# Altium PCB PCB.PcbDoc
Units mm, origin at the board's own origin, x right, y up, seen from the top; angles counter-clockwise.
Board outline 85 x 82.5 mm, 2 copper layers (Top Layer, Bottom Layer); 38 components, 31 nets, 144 pads, 23 vias.
Unrouted connection lines stored in the file: 1.
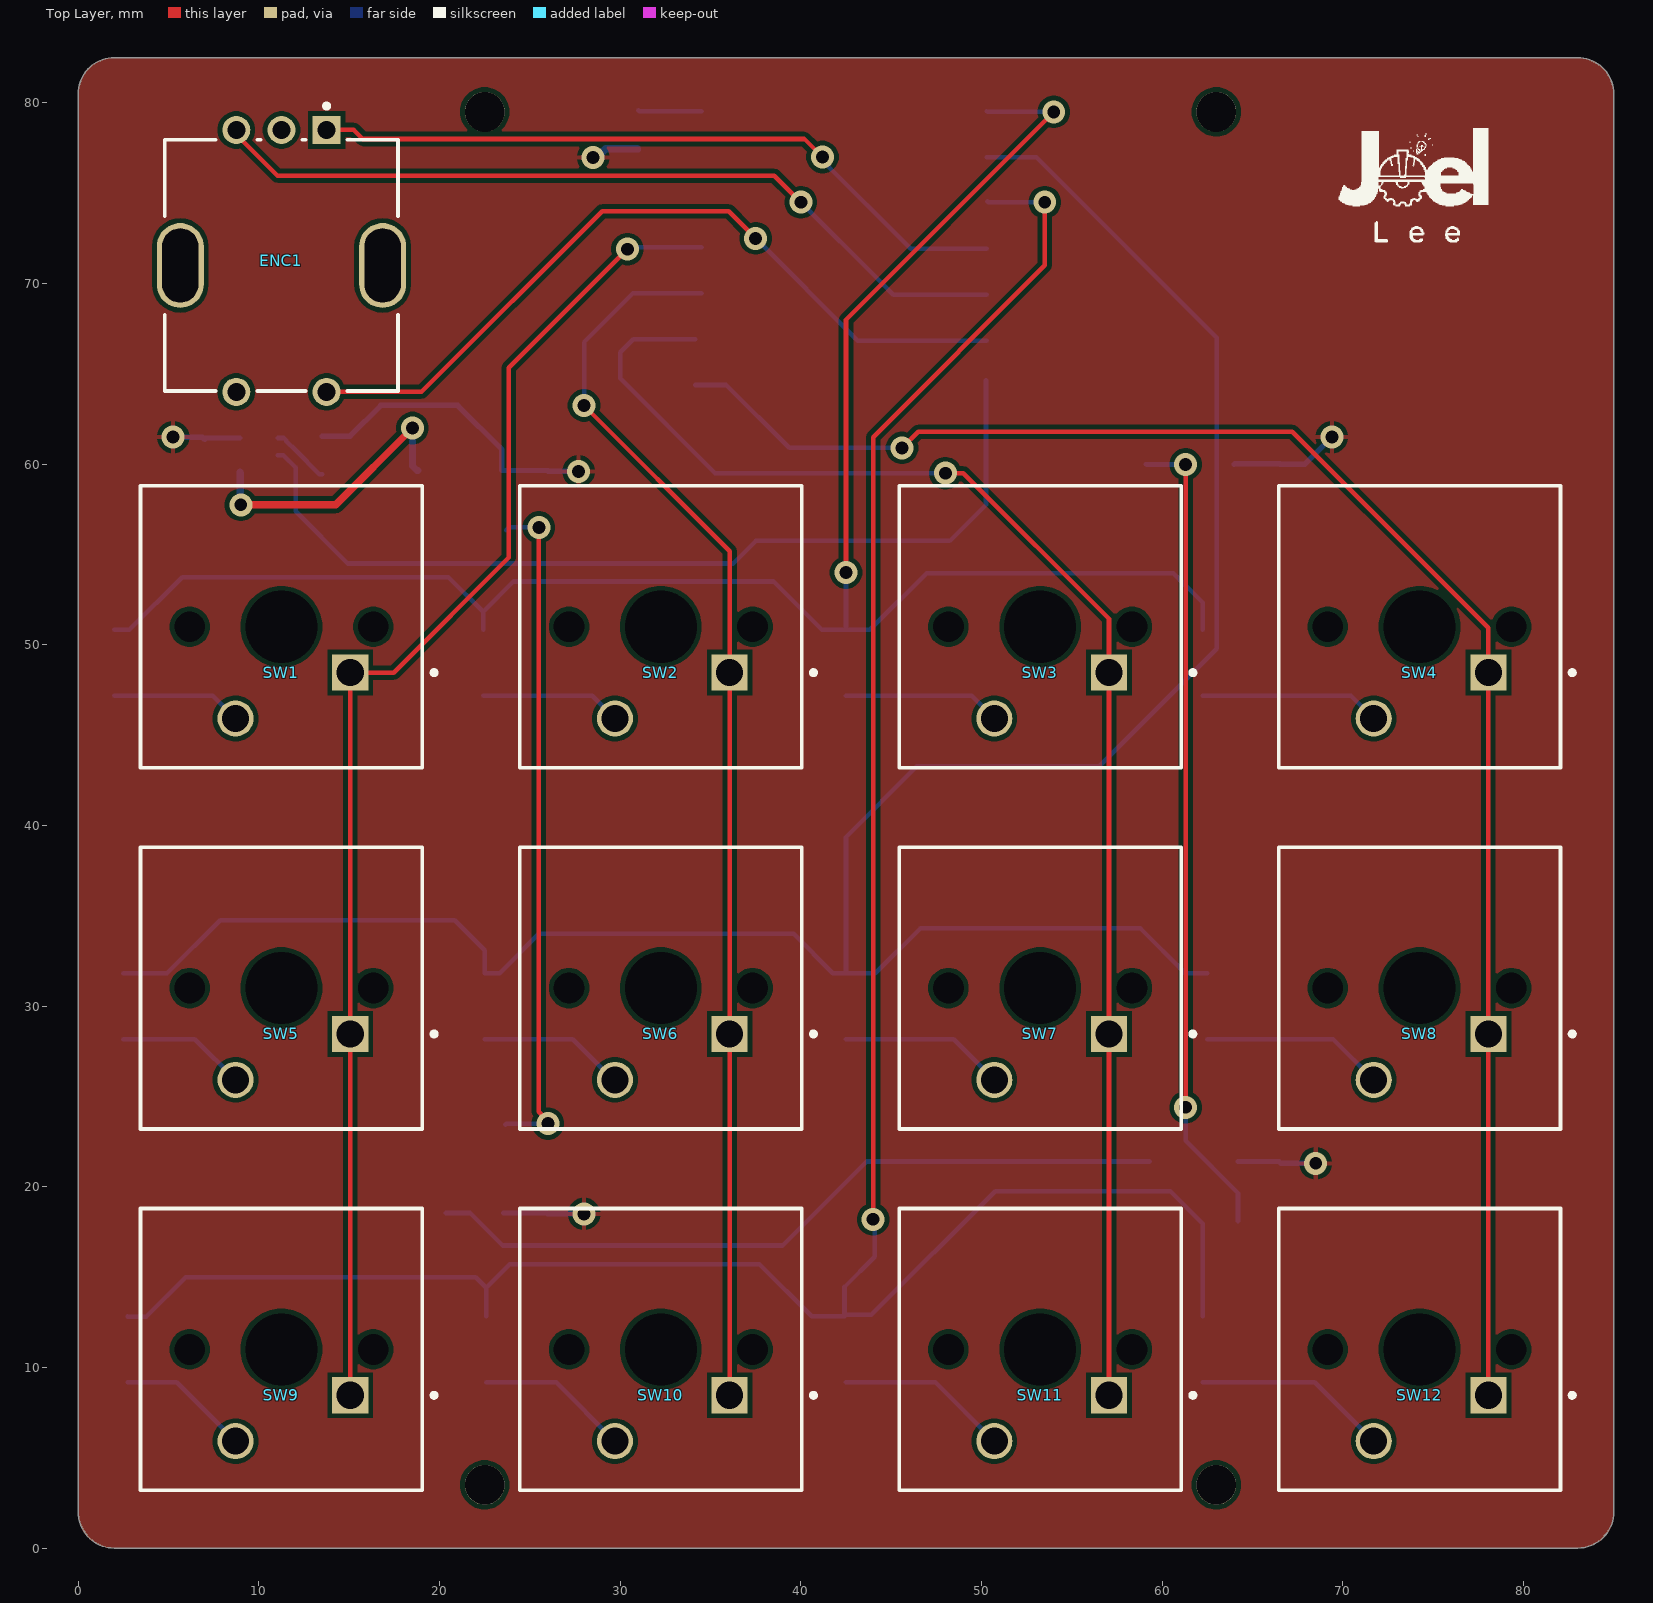
[diagram p0: Top Layer view]
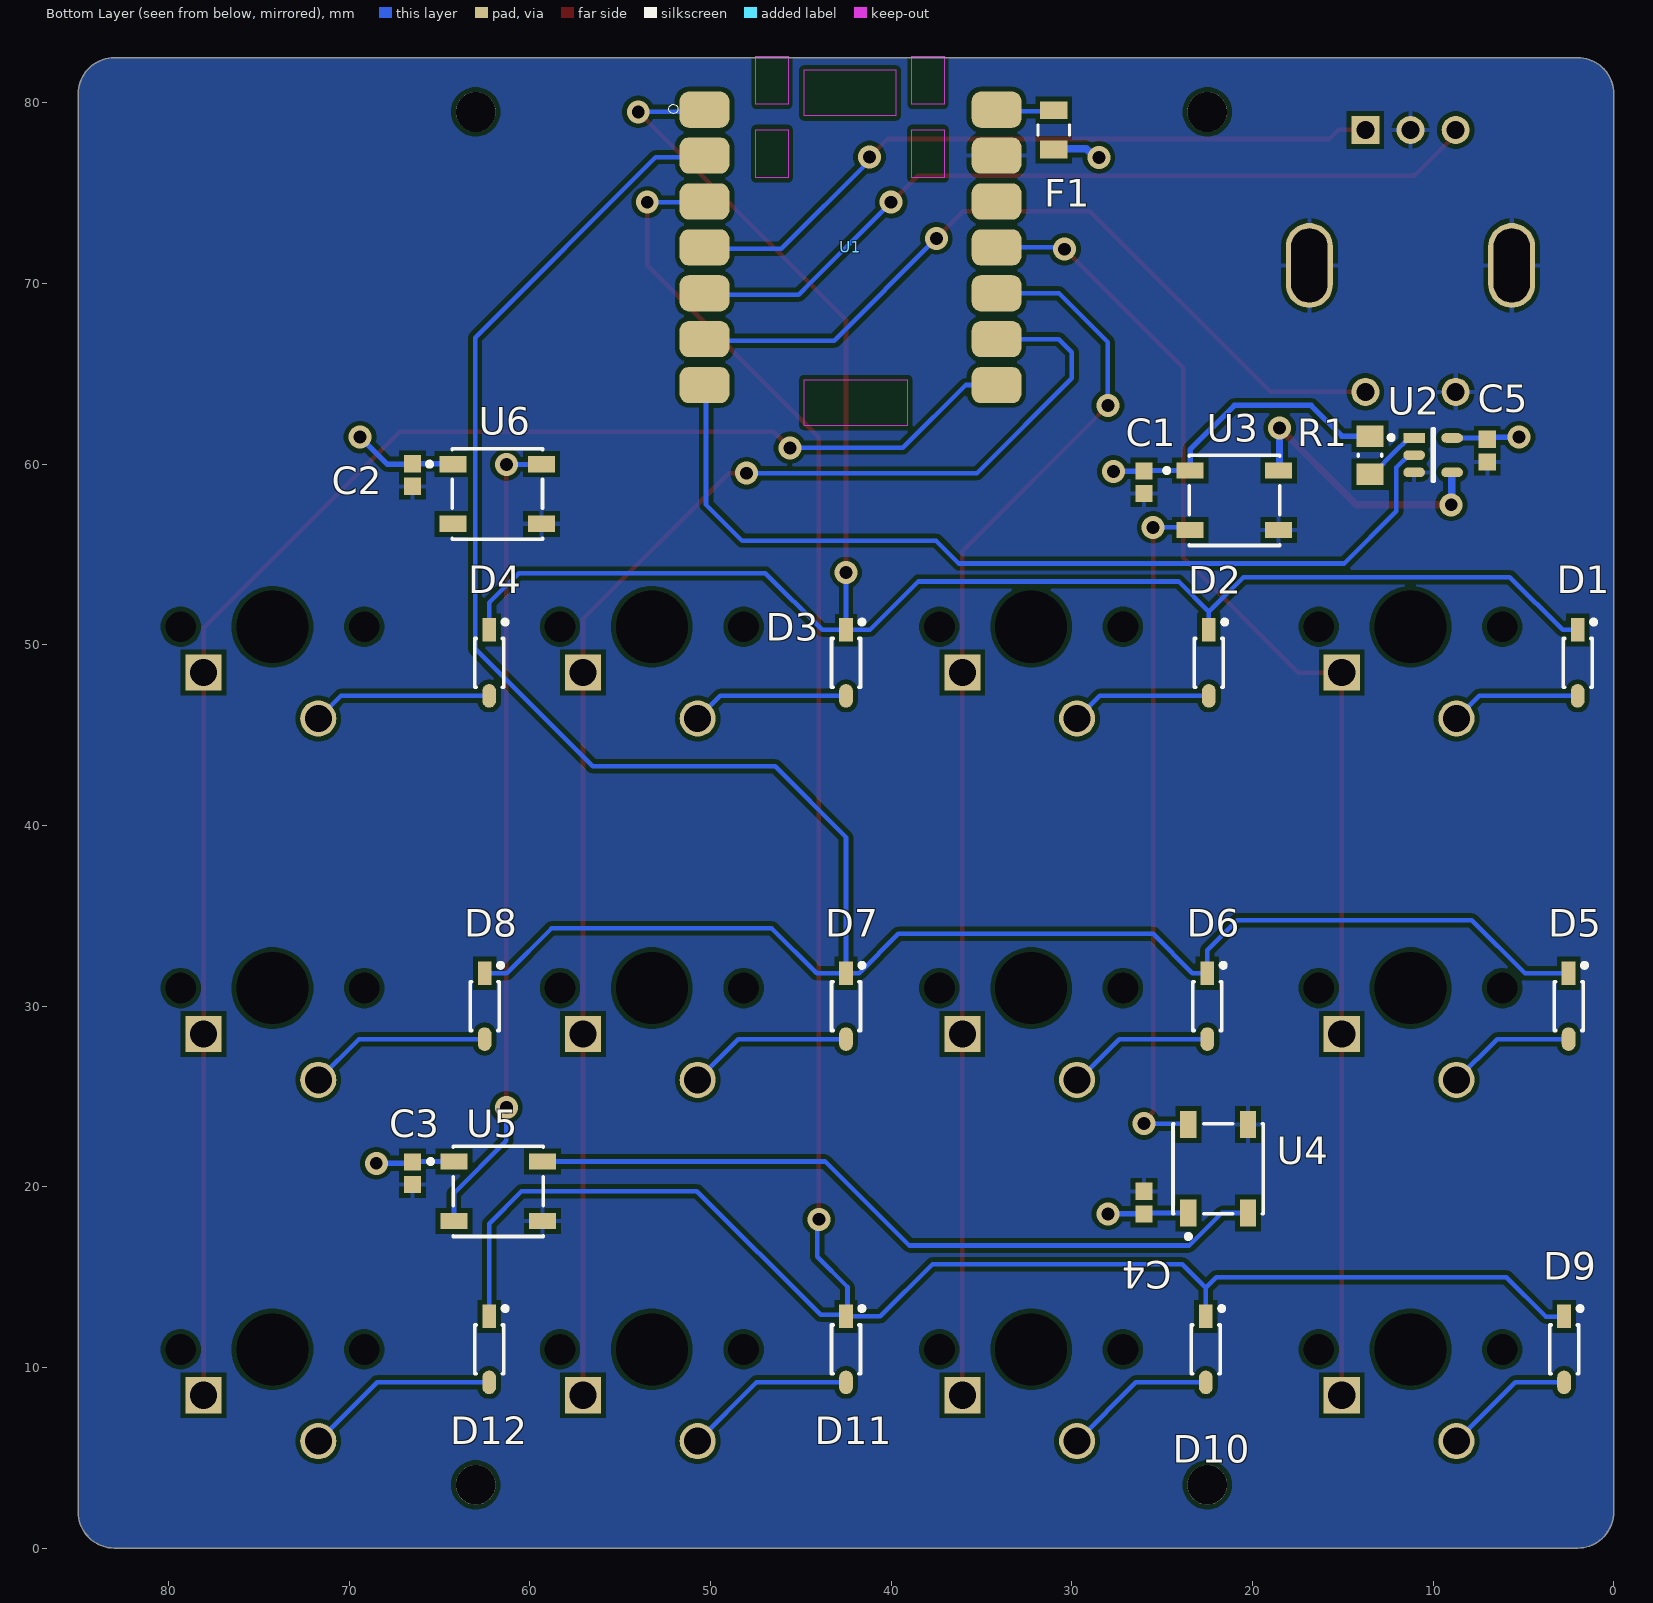
[diagram p1: Bottom Layer view, seen from below]
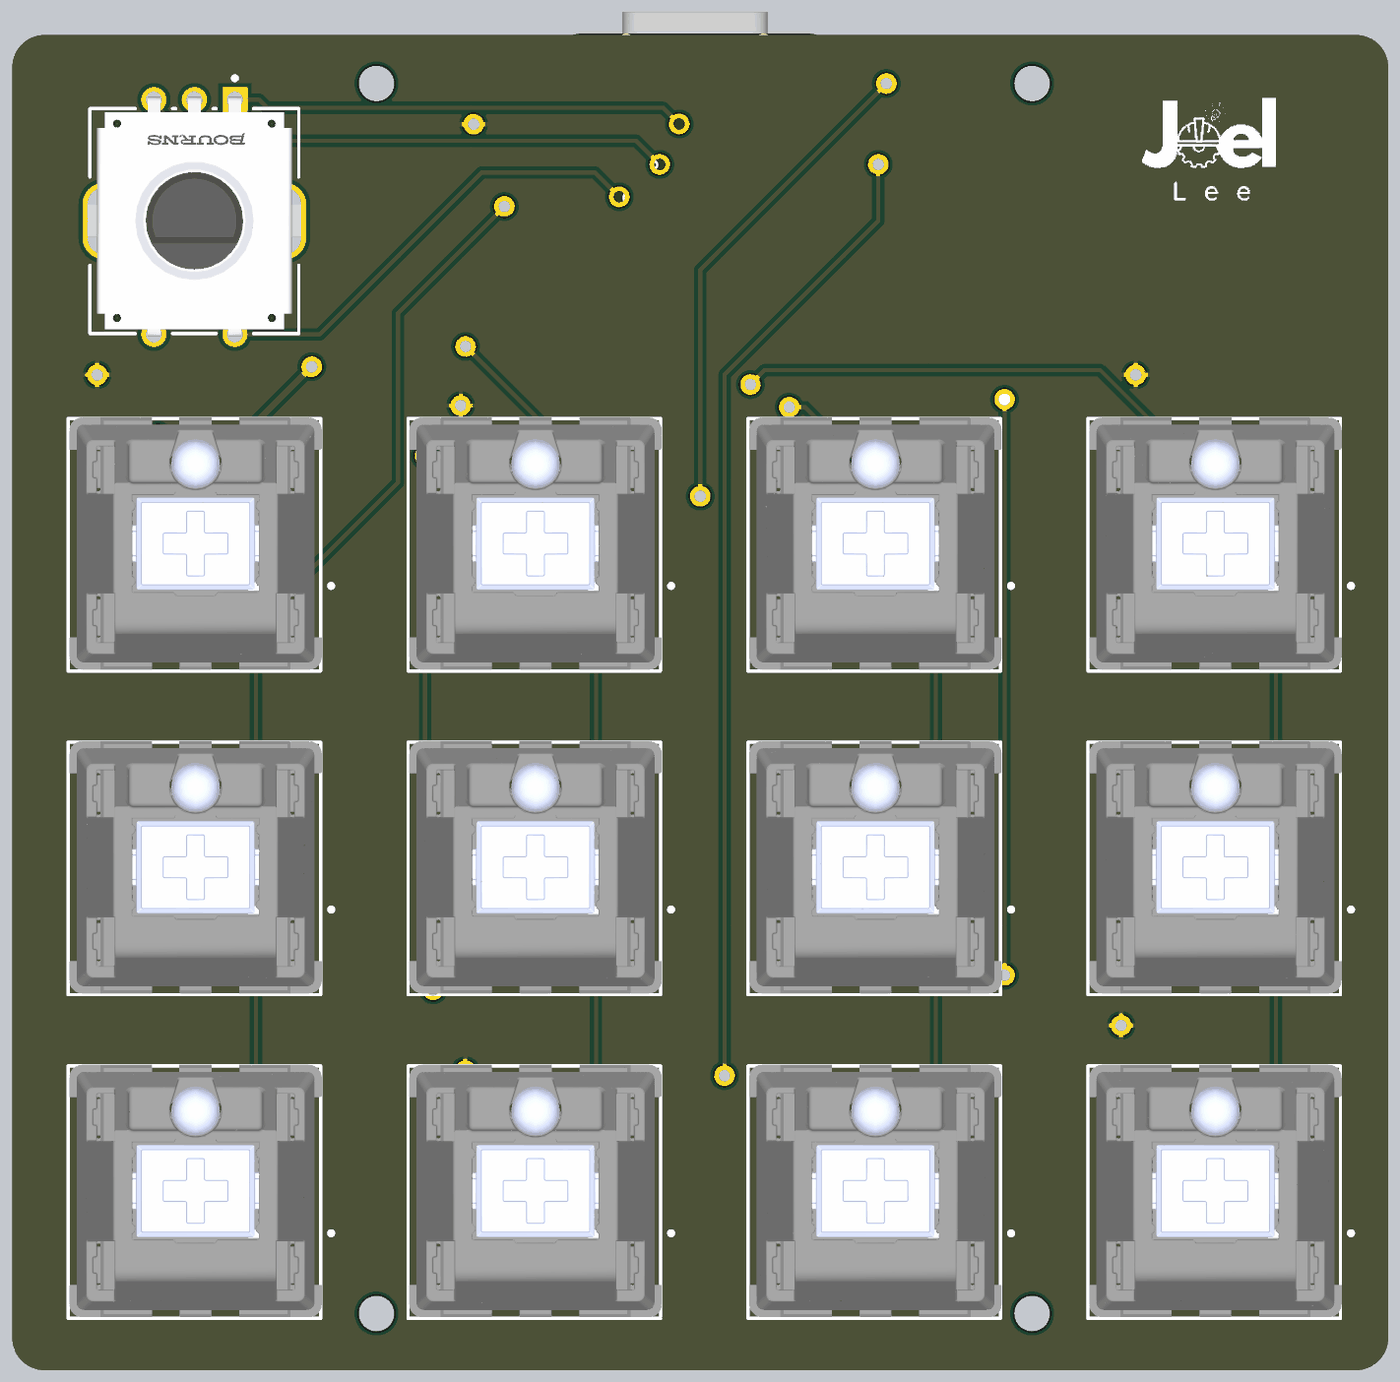
[diagram p2: 3D render of the assembled board from above, using the file's embedded part models]
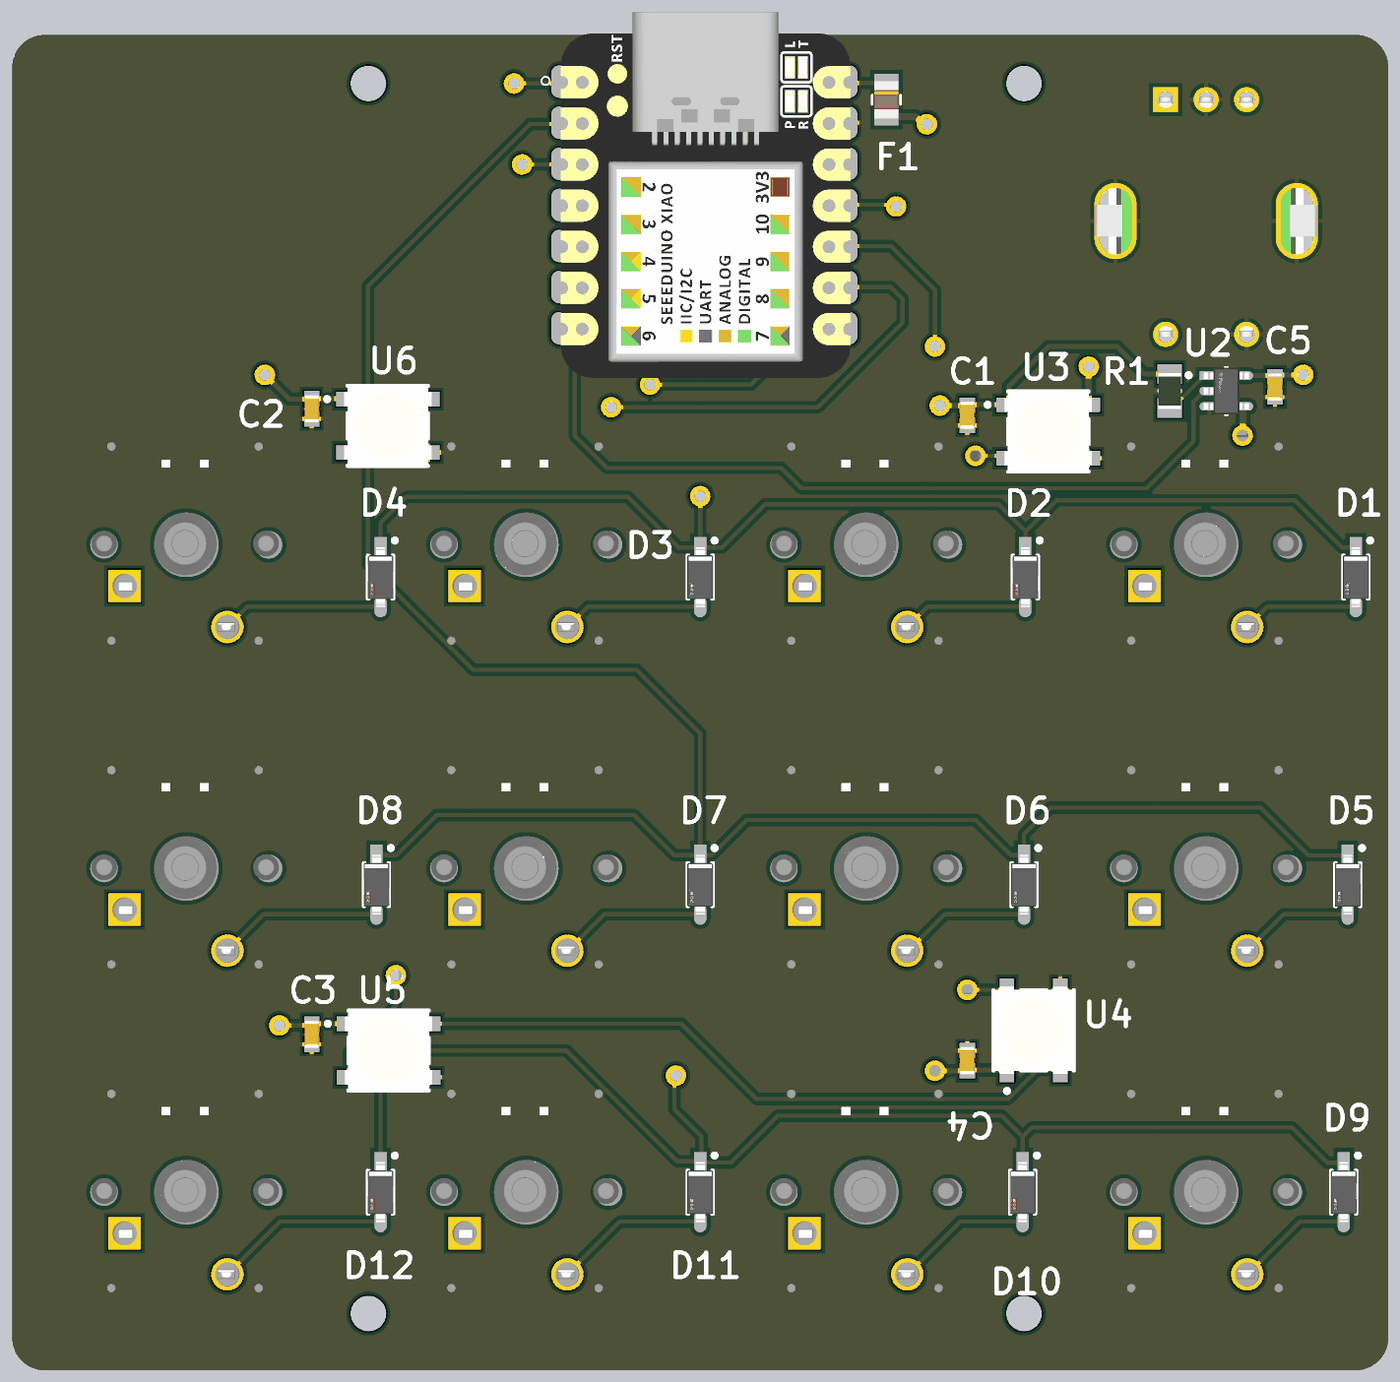
[diagram p3: 3D render of the assembled board from below, using the file's embedded part models]

## Layer stack, top to bottom
Top Solder: solder mask 0.0102, Solder Resist, Dk 3.5
Top Layer: signal copper 0.0356
Dielectric 1: dielectric 0.32, FR-4, Dk 4.8
Bottom Layer: signal copper 0.0356
Bottom Solder: solder mask 0.0102, Solder Resist, Dk 3.5

## Board outline
0,2 0,80.5 cw(c2,80.5) 2,82.5 83,82.497 cw(c83.002,80.498) 85,80.5 85,2 cw(c83,2) 83,0 2,0 cw(c2,2)

## Design rules (kind name [scope] priority, off if disabled: settings)
Clearance Clearance_1 [OnMid vs OnMid] p1: gap=0.254 ignorepadtopadclearanceinfootprint=FALSE sourcerule=38 cellrowname=All cellrowtype=0 cellcolname=All cellcoltype=0 innerlayers=TRUE
Clearance Clearance_2 [(ExistsOnLayer('Top Layer') Or ExistsOnLayer('Bottom Layer')) vs (ExistsOnLayer('Top Layer') Or ExistsOnLayer('Bottom Layer'))] p2: gap=0.254 ignorepadtopadclearanceinfootprint=FALSE sourcerule=38 cellrowname=All cellrowtype=0 cellcolname=All cellcoltype=0 outerlayers=TRUE
Clearance [All] p3: gap=0.254 ignorepadtopadclearanceinfootprint=FALSE ismatrix=TRUE
HoleSize [All] p1: absolutevalues=TRUE maxlimit=5 minlimit=0.025 maxpercent=80.000 minpercent=20.000
MinimumSolderMaskSliver [All] p1: minsoldermaskwidth=0.09
PolygonConnect [All] p1: connectstyle=Relief reliefconductorwidth=0.254 reliefentries=4 polygonreliefangle="90 Angle" airgapwidth=0.254
RoutingVias [All] p1: holewidth=0.711 width=1.27 viastyle="Through Hole" minholewidth=0.711 minwidth=1.27 maxholewidth=0.711 maxwidth=1.27
SilkToSolderMaskClearance [IsPad] p1: minsilkscreentomaskgap=0.09 clearancetoexposedcopper=TRUE
SolderMaskExpansion [All] p1: expansion=0.102 istentingtop=FALSE
Width MaxMinWidth_1 [InNet('5V')] p1: maxlimit=0.5 minlimit=0.3 preferedwidth=0.4 minimp=50.000000 maximp=50.000000 favimp=50.000000
Width MaxMinWidth_2 [InNet('NeoPixel 5V')] p2: maxlimit=0.5 minlimit=0.3 preferedwidth=0.4 minimp=50.000000 maximp=50.000000 favimp=50.000000
Width [All] p3: maxlimit=0.254 minlimit=0.254 preferedwidth=0.254
27 further rules are at their usual default settings.

## Components (designator, comment, footprint, x,y, rotation, side; value= is the part's Value field where it differs from the comment)
C1 "Capacitor 100 nF +/-10% 50 V 0603" CAPC1608X90X40NL10T20 26,59 r90 bottom value=100nF
C2 "Capacitor 100 nF +/-10% 50 V 0603" CAPC1608X90X40NL10T20 66.5,59.4 r90 bottom value=100nF
C3 "Capacitor 100 nF +/-10% 50 V 0603" CAPC1608X90X40NL10T20 66.5,20.75 r90 bottom value=100nF
C4 "Capacitor 100 nF +/-10% 50 V 0603" CAPC1608X90X40NL10T20 26,19.125 r270 bottom value=100nF
C5 "Capacitor 100 nF +/-10% 50 V 0603" CAPC1608X90X40NL10T20 7,60.75 r90 bottom value=100nF
D1 "1N4148W-TP" FP-SOD-123-IPC_A 2,49 r270 bottom
D2 "1N4148W-TP" FP-SOD-123-IPC_A 22.417,49 r270 bottom
D3 "1N4148W-TP" FP-SOD-123-IPC_A 42.5,49 r270 bottom
D4 "1N4148W-TP" FP-SOD-123-IPC_A 62.25,49 r270 bottom
D5 "1N4148W-TP" FP-SOD-123-IPC_A 2.5,30 r270 bottom
D6 "1N4148W-TP" FP-SOD-123-IPC_A 22.5,30 r270 bottom
D7 "1N4148W-TP" FP-SOD-123-IPC_A 42.5,30 r270 bottom
D8 "1N4148W-TP" FP-SOD-123-IPC_A 62.5,30 r270 bottom
D9 "1N4148W-TP" FP-SOD-123-IPC_A 2.75,11 r270 bottom
D10 "1N4148W-TP" FP-SOD-123-IPC_A 22.583,11 r270 bottom
D11 "1N4148W-TP" FP-SOD-123-IPC_A 42.5,11 r270 bottom
D12 "1N4148W-TP" FP-SOD-123-IPC_A 62.25,11 r270 bottom
ENC1 "PEC12R-4220F-S0024" FP-PEC12R-4220F-S0024-MFG 11.25,71 r180 top
F1 "0ZCK0050FF2E" 0ZCK_BEL 31,78.5 r270 bottom
R1 "Resistor 10k +/-1% 0805 125 mW" RESC2013X50X35ML15T15 13.5,60.5 r90 bottom value=10k
SW1 "MX1A-11NW" CHRY-MX1A-11NW_V 11.25,51 r180 top
SW2 "MX1A-11NW" CHRY-MX1A-11NW_V 32.25,51 r180 top
SW3 "MX1A-11NW" CHRY-MX1A-11NW_V 53.25,51 r180 top
SW4 "MX1A-11NW" CHRY-MX1A-11NW_V 74.25,51 r180 top
SW5 "MX1A-11NW" CHRY-MX1A-11NW_V 11.25,31 r180 top
SW6 "MX1A-11NW" CHRY-MX1A-11NW_V 32.25,31 r180 top
SW7 "MX1A-11NW" CHRY-MX1A-11NW_V 53.25,31 r180 top
SW8 "MX1A-11NW" CHRY-MX1A-11NW_V 74.25,31 r180 top
SW9 "MX1A-11NW" CHRY-MX1A-11NW_V 11.25,11 r180 top
SW10 "MX1A-11NW" CHRY-MX1A-11NW_V 32.25,11 r180 top
SW11 "MX1A-11NW" CHRY-MX1A-11NW_V 53.25,11 r180 top
SW12 "MX1A-11NW" CHRY-MX1A-11NW_V 74.25,11 r180 top
U1 "MOUDLE-SEEEDUINO-XIAO" MOUDLE14P-2-54-21X17-8MM 51.167,61.5 r180 bottom
U2 "SN74AHCT1G126DBVR" FP-DBV0005A-IPC_C 10,60.5 r180 bottom
U3 "WS2812B NeoPixel" ADA-RGB-1655_V 21,58 r180 bottom
U4 "WS2812B NeoPixel" ADA-RGB-1655_V 21.9,21 r90 bottom
U5 "WS2812B NeoPixel" ADA-RGB-1655_V 61.75,19.75 r180 bottom
U6 "WS2812B NeoPixel" ADA-RGB-1655_V 61.8,58.35 r180 bottom

## Footprints (in the part's own frame and the unit in brackets; to place one, negate y for a bottom-side part, rotate by r counter-clockwise, add the part's x,y. Pads: shape width x height; smd on the part's side, far side on the other; paste and mask are expansions set on the pad)
0ZCK_BEL [mil]
  rect 39x59 smd paste+0 mask+0: 1(-43,0) 2(43,0)
  silkscreen extent -11,-34 11,35, body extent -46,-30 46,30, height 71
ADA-RGB-1655_V [mm] "SMD, 4-Leads, Body 5x5mm"
  rect 1.5x0.9 smd: 1(-2.45,1.65) 2(-2.45,-1.65) 3(2.45,-1.65) 4(2.45,1.65)
  silkscreen extent -3.88,-2.5 2.5,2.5, body extent -2.7,-2.5 2.7,2.5, height 1.68
CAPC1608X90X40NL10T20 [mm] "Chip Capacitor, 2-Leads, Body 1.70x0.90mm, IPC Medium Density"
  rect 0.95x0.95 smd: 1(-0.625,0) 2(0.625,0)
  body extent -0.85,-0.45 0.85,0.45, height 0.9
CHRY-MX1A-11NW_V [mm] "THD, 2-Leads, Body 15.6x15.6mm"
  rect 2x2 hole 1.499 paste-2539.97: 1(-3.81,2.54)
  round 2 hole 1.499 paste-2539.97: 2(2.54,5.08)
  round 0 hole 3.988 unplated paste-2539.97: MH1(0,0)
  round 0 hole 1.702 unplated paste-2539.97: MH2(-5.08,0) MH3(5.08,0)
  silkscreen extent -8.58,-7.8 7.8,7.8, body extent -7.87,-7.87 7.73,7.73, height 3.5
FP-DBV0005A-IPC_C [mm]
  rect 1.205x0.532 smd paste+0 mask+0: 1(-1.05,0.95)
  rrect100% 1.205x0.532 smd paste+0 mask+0: 2(-1.05,0) 3(-1.05,-0.95) 4(1.05,-0.95) 5(1.05,0.95)
  silkscreen extent -2.45,-1.45 0.05,1.45, body extent -1.4,-1.45 1.4,1.45, height 1.45
FP-PEC12R-4220F-S0024-MFG [mm]
  round 1.55 hole 1 paste-2539.97 mask+0: 1(-2.5,7) 2(2.5,7) B(2.5,-7.5) C(0,-7.5)
  rrect100% 2.6x4.7 hole 4.1 slot 2 at 0 deg paste-2539.97 mask+0: 3(-5.6,0) 4(5.6,0)
  rect 1.55x1.55 hole 1 paste-2539.97 mask+0: A(-2.5,-7.5)
  silkscreen extent -6.45,-8.95 6.45,6.95, body extent -7,-8.37 7,7.88, height 0.25
FP-SOD-123-IPC_A [mm]
  rect 1.308x0.762 smd paste+0 mask+0: 1(-1.825,0)
  rrect100% 1.308x0.762 smd paste+0 mask+0: 2(1.825,0)
  silkscreen extent -2.39,-0.8 1.35,1.01, body extent -1.85,-0.8 1.85,0.8, height 1.35
MOUDLE14P-2-54-21X17-8MM [mm]
  rrect50% 2.75x2 smd: 1(0.835,18.12) 2(0.835,15.58) 3(0.835,13.04) 4(0.835,10.5) 5(0.835,7.96) 6(0.835,5.42) 7(0.835,2.88) 8(17,2.88) 9(17,5.42) 10(17,7.96) 11(17,10.5) 12(17,13.04) 13(17,15.58) 14(17,18.12)
  Top Layer keep-out region: 6.35,17.78 6.35,20.32 11.43,20.32 11.43,17.78
  Top Layer keep-out region: 6.35,0.635 6.35,3.175 12.065,3.175 12.065,0.635
  Top Layer keep-out region: 3.683,18.415 3.683,21.082 5.461,21.082 5.461,18.415
  Top Layer keep-out region: 3.683,14.351 3.683,17.018 5.461,17.018 5.461,14.351
  Top Layer keep-out region: 12.319,14.351 12.319,17.018 14.097,17.018 14.097,14.351
  Top Layer keep-out region: 12.319,18.415 12.319,21.082 14.097,21.082 14.097,18.415
  silkscreen extent -1.14,17.91 -0.64,18.41, body extent 0.05,-0.2 17.95,22.4, height 4.5
RESC2013X50X35ML15T15 [mm] "Chip Resistor, 2-Leads, Body 2.2x1.4mm, IPC Low Density"
  rect 1.2x1.5 smd: 1(-1.05,0) 2(1.05,0)
  silkscreen extent -0.05,-0.65 0.05,0.65, body extent -1.1,-0.7 1.1,0.7, height 0.5

## Part data
C1 C2 C3 C4 C5: library part CMP-001-00017-6, "Chip Capacitor, 100 nF, +/- 10%, 50 V, 0603 (1608 Metric)", Capacitor Type=Ceramic, Case/Package=0603, Max Operating Temperature=125°C, Min Operating Temperature=-55°C, Tolerance=10%, Voltage Rating=50V, Mounting Technology=SM, Pins=2, RoHS Compliant=True
D1 D2 D3 D4 D5 D6 D7 D8 D9 D10 D11 D12: library part CMP-2000-04993-2, "DIODE GEN PURP 100V 150MA SOD123", Average Rectified Current=150mA, Capacitance=4pF, Forward Voltage=1V, Max Forward Surge Current (Ifsm)=1A, Max Operating Temperature=150°C, Max Repetitive Reverse Voltage (Vrrm)=100V, Max Reverse Leakage Current=5uA, Max Surge Current=2A, Min Operating Temperature=-65°C, Package Quantity=3000, Power Dissipation=400mW, Current Rating=150mA, Element Configuration=Single, Forward Current=150mA, Height=1.2mm, Lead Free="Lead Free", Length=2.85mm, Max Reverse Voltage (DC)=100V, Mount="Surface Mount", Number of Pins=2, Output Current=150mA, Packaging="Tape and Reel", Peak Non-Repetitive Surge Current=2A, Polarity=Standard, Radiation Hardening=No, Recovery Time=4ns, Reverse Recovery Time=4ns, Voltage Rating (DC)=100V, Width=1.8mm
ENC1: library part CMP-07421-000021-1, "ROTARY ENCODER MECHANICAL 24PPR", Max Operating Temperature=70°C, Max Supply Voltage (DC)=5V, Min Operating Temperature=-30°C, Package Quantity=150, Built in Switch=Yes, Detent=Yes, Encoder Type=Mechanical, Height=13.4mm, Hole Diameter=2mm, Length=26mm, Mount="Through Hole", Number of Channels=2, Orientation=Vertical, Output Type=Quadrature, Packaging=Bulk, Pulses per Revolution=24, REACH SVHC="No SVHC", RoHS Compliant=Yes, Series=PEC12R, Termination="PC Pin", Width=12.5mm
F1: "No Description Available", Mfr_Name=Belfuse
R1: library part CMP-009-00018-5, "Chip Resistor, 10 KOhm, +/- 1%, 125 mW, -55 to 155 degC, 0805 (2012 Metric)", Case/Package=0805, Max Operating Temperature=155°C, Min Operating Temperature=-55°C, Power=125mW, Tolerance=1%, Voltage Rating=150V, Mounting Technology=SM, Pins=2, RoHS Compliant=True
SW1 SW2 SW3 SW4 SW5 SW6 SW7 SW8 SW9 SW10 SW11 SW12: library part CMP-00028-00007-1, "Keypad Switch, 1 Switches, SPST, Momentary, 0.01A, 12VDC, 0.78N, Solder Terminal, Through Hole-straight", Max Operating Temperature=70°C, Min Operating Temperature=-10°C, Mounting Technology="Through Hole", RoHS Compliant=Yes
U1: Package=MOUDLE14P-2.54-21X17.8MM, DeviceSetName=MOUDLE-SEEEDUINO-XIAO, GateName_1=G$1, LibraryName=Seeeduino-XIAO-footprint-eagle, SymbolName_1=MOUDLE-SEEEDUINO-XIAO
U2: library part CMP-0859-00077-4, "IC BUF NON-INVERT 5.5V SOT23-5", Case/Package=SOT-23, High Level Output Current=-8mA, Low Level Output Current=8mA, Max Operating Temperature=125°C, Max Supply Voltage=5.5V, Min Operating Temperature=-40°C, Min Supply Voltage=4.5V, Nominal Supply Current=250mA, Operating Supply Voltage=5V, Package Quantity=3000, Quiescent Current=1uA, Contact Plating=Tin, Lead Free="Lead Free", Logic Function=Buffer, Mount="Surface Mount", Number of Bits=1, Number of Bits per Element=1, Number of Channels=1, Number of Circuits=1, Number of Elements=1, Number of Gates=1, Number of Input Lines=1, Number of Inputs=1, Number of Output Lines=1, Number of Outputs=1, Number of Pins=5, Output Type=3-STATE, Packaging="Tape and Reel", Polarity=Non-Inverting, Propagation Delay=7.5ns, Radiation Hardening=No, REACH SVHC="No SVHC", RoHS Compliant=Yes, Series=74AHCT, Technology=CMOS, Turn-On Delay Time=10ns
U3 U4 U5 U6: library part CMP-007-00037-1, "WS2812B 5050 RGB LED WITH INTEGRATED DRIVER CHIP PACK OF 10"

## Free pads (board coordinates)
  round 2.2 hole 2.2 unplated: MH5(22.5,3.5) MH5(22.5,79.5) MH5(63,3.5) MH5(63,79.5)

## Via types
v1: diameter 1.27, hole 0.711, Top Layer to Bottom Layer, 23 vias

## Nets (pads, with @x,y where several pads share a name; then routed paths per layer and width w, separated by ;. In a path a pad name is that pad's centre, name@x,y a point inside that pad or via, vN(x,y) a via of type N, cw(c..) or ccw(c..) an arc to the next point about the centre after c; other vN are vias at no path point)
5V: C1.2 C2.2 C3.2 C4.2 C5.2 F1.2 R1.2 U2.5 U3.1 U4.1 U5.1 U6.1 | length 38.4
  Bottom Layer w0.3: v1(5.25,61.5) 6.875,61.5 C5.2 7.075,61.45 U2.5 ; R1.2 15.05,61.55 16.75,63.25 21,63.25 23.45,60.8 U3.1 25.975,59.65 C1.2 26.025,59.6 v1(27.7,59.6) ; U4.1 25.95,18.55 C4.2 v1(28,18.5) ; F1.2@30.958,77.45 F1.2 ; U6.1@64,60 64.025,60.025 C2.2 ; U5.1 66.475,21.4 66.575,21.3 v1(68.5,21.3) ; C2.2@66.5,60 67.9,60 v1(69.4,61.5)
  Bottom Layer w0.4: v1(28.5,76.984) 28.735,76.984 29.205,77.454 30.954,77.454 F1.2@30.958,77.45
COL1: SW1.1 SW5.1 SW9.1 U1.11 | length 75.3
  Top Layer w0.254: SW9.1 SW5.1 SW1.1 17.46,48.46 23.833,54.833 23.833,65.333 v1(30.4,71.9)
  Bottom Layer w0.254: v1(30.4,71.9) 30.5,72 U1.11@34.5,72
COL2: SW2.1 SW6.1 SW10.1 U1.10 | length 68.6
  Top Layer w0.254: v1(28,63.25) 36.06,55.19 SW2.1 SW10.1@36.06,9.16
  Bottom Layer w0.254: v1(28,63.25) 28,66.75 30.71,69.46 U1.10@34.5,69.46
COL3: SW3.1 SW7.1 SW11.1 U1.9 | length 81.5
  Top Layer w0.254: v1(48,59.5) 49,59.5 57.06,51.44 SW3.1 SW11.1
  Bottom Layer w0.254: U1.9 30.72,66.92 30,66.2 30,64.75 35.25,59.5 v1(48,59.5)
COL4: SW4.1 SW8.1 SW12.1 U1.8 | length 92.7
  Top Layer w0.254: v1(45.6,60.9) 46.5,61.8 67.2,61.8 78.06,50.94 SW4.1 SW8.1 SW12.1
  Bottom Layer w0.254: U1.8 35.87,64.38 39.35,60.9 v1(45.6,60.9)
GND: C1.1 C2.1 C3.1 C4.1 C5.1 ENC1.2 ENC1.3 ENC1.4 ENC1.C U1.13 U2.3 U3.3 U4.3 U5.3 U6.3
"NeoPixel 5V": U2.4 U3.4 | length 15.6
  Top Layer w0.4: v1(9,57.75) 14.25,57.75 v1(18.5,62)
  Bottom Layer w0.4: U2.4 8.975,59.525 8.975,57.775 v1(9,57.75) ; v1(18.5,62) 18.5,59.9 18.75,59.65 U3.4@18.8,59.65
NetD1_2: D1.2 SW1.2 | length 7.2
  Bottom Layer w0.254: D1.2 7.455,47.175 SW1.2
NetD2_2: D2.2 SW2.2 | length 7.8
  Bottom Layer w0.254: D2.2 28.455,47.175 SW2.2
NetD3_2: D3.2 SW3.2 | length 8.7
  Bottom Layer w0.254: D3.2 49.455,47.175 SW3.2
NetD4_2: D4.2 SW4.2 | length 10
  Bottom Layer w0.254: D4.2 70.455,47.175 SW4.2
NetD5_2: D5.2 SW5.2 | length 7.1
  Bottom Layer w0.254: D5.2 6.455,28.175 SW5.2
NetD6_2: D6.2 SW6.2 | length 8.4
  Bottom Layer w0.254: D6.2 27.365,28.175 SW6.2@29.87,25.67
NetD7_2: D7.2 SW7.2 | length 9.1
  Bottom Layer w0.254: D7.2 48.455,28.175 SW7.2
NetD8_2: D8.2 SW8.2 | length 10.1
  Bottom Layer w0.254: D8.2 69.455,28.175 SW8.2
NetD9_2: D9.2 SW9.2 | length 7.3
  Bottom Layer w0.254: D9.2 5.455,9.175 SW9.2
NetD10_2: D10.2 SW10.2 | length 8.5
  Bottom Layer w0.254: D10.2 26.455,9.175 SW10.2
NetD11_2: D11.2 SW11.2 | length 9.6
  Bottom Layer w0.254: D11.2 47.455,9.175 SW11.2
NetD12_2: D12.2 SW12.2 | length 10.8
  Bottom Layer w0.254: D12.2 68.455,9.175 SW12.2
NetF1_1: F1.1 U1.14 | length 3.5
  Bottom Layer w0.254: F1.1 31.052,79.54 U1.14@34.5,79.54
NetR1_1: R1.1 U2.1 | length 3.3
  Bottom Layer w0.254: U2.1 11.387,61.45 11.526,61.311 11.526,61.276 12.034,60.768 12.034,60.766 13.35,59.45 R1.1
NetU3_2: U3.2 U4.4 | length 37.4
  Top Layer w0.254: v1(25.5,56.5) 25.5,24.157 26,23.657 v1(26,23.5)
  Bottom Layer w0.254: U4.4@23.65,23.45 23.7,23.5 v1(26,23.5) ; U3.2@23.7,56.35 23.85,56.5 v1(25.5,56.5)
NetU4_2: U4.2 U5.4 | length 41.6
  Bottom Layer w0.254: U4.2@20.35,18.55 21.7,18.55 23.5,16.75 39,16.75 43.65,21.4 U5.4
NetU5_2: U5.2 U6.4 | length 45.3
  Top Layer w0.254: v1(61.3,24.4) v1(61.3,59.984)
  Bottom Layer w0.254: U6.4@59.1,60 59.116,59.984 v1(61.3,59.984) ; v1(61.3,24.4) 61.3,22.55 64.2,19.65 U5.2
Pixel: U1.7 U2.2 | length 51.3
  Bottom Layer w0.254: U2.2 11.352,60.5 12.034,59.818 12.034,57.389 14.923,54.5 36.25,54.5 37.5,55.75 48.25,55.75 50.25,57.75 U1.7@50.25,64.63
ROTA: ENC1.A U1.4 | length 39.4
  Top Layer w0.254: ENC1.A 15.25,78.5 15.75,78 19.5,78 40.2,78 v1(41.2,77)
  Bottom Layer w0.254: v1(41.2,77) 41.2,76.8 46.08,71.92 U1.4@50.3,71.92
ROTB: ENC1.B U1.5 | length 46.1
  Top Layer w0.254: ENC1.B@8.625,78.375 11.032,75.968 38.532,75.968 v1(40,74.5) ; ENC1.B@8.75,78.75 ENC1.B@9.25,78.25
  Bottom Layer w0.254: v1(40,74.5) 44.417,70.083 45.12,69.38 U1.5@50.3,69.38
ROTSW: ENC1.1 U1.6 | length 43.7
  Top Layer w0.254: ENC1.1 19,64 29,74 36,74 v1(37.5,72.5)
  Bottom Layer w0.254: v1(37.5,72.5) 43.16,66.84 U1.6@50.3,66.84
ROW1: D1.1 D2.1 D3.1 D4.1 U1.1 | length 105.7
  Top Layer w0.254: v1(42.5,54) 42.5,68 v1@53.984,79.484
  Bottom Layer w0.254: D1.1 2.825,50.825 5.75,53.75 20.499,53.75 22.417,51.832 ; D2.1 22.417,51.832 ; v1(42.5,54) D3.1 ; U1.1@50.3,79.54 50.34,79.5 v1(54,79.5) ; D4.1 62.25,52.34 60.624,53.966 46.966,53.966 43.825,50.825 D3.1 ; 22.417,51.832 24.091,53.507 38.491,53.507 41.173,50.825 42.333,50.825 D3.1
ROW2: D5.1 D6.1 D7.1 D8.1 U1.2 | length 133.5
  Bottom Layer w0.254: D5.1 2.5,31.817 4.917,31.817 7.863,34.763 20.836,34.763 22.5,33.099 D6.1 23.325,31.825 25.5,34 39.6,34 41.775,31.825 D7.1 ; U1.2@50.3,77 53.021,77 63.025,66.996 63.025,49.775 56.523,43.272 46.414,43.272 42.5,39.358 D7.1 ; D8.1 61.275,31.825 58.8,34.3 46.6,34.3 44.125,31.825 D7.1
ROW3: D9.1 D10.1 D11.1 D12.1 U1.3 | length 142.1
  Top Layer w0.254: v1@44,18 44,61.5 53.5,71 v1(53.5,74.5)
  Bottom Layer w0.254: D9.1 2.75,12.818 3.767,12.818 5.95,15 21.996,15 22.583,14.413 ; D10.1 22.583,14.413 ; v1@44.1,17.9 44.1,16.136 42.417,14.453 D11.1@42.417,12.825 ; U1.3 50.372,74.5 v1(53.5,74.5) ; D12.1 62.25,17.962 60.46,19.752 50.752,19.752 43.908,12.908 42.5,12.908 D11.1@42.417,12.825 ; 22.583,14.413 23.884,15.713 37.712,15.713 40.6,12.825 D11.1@42.417,12.825
  other v1: 44,18.2
pads on no net: SW1.MH1 SW1.MH2 SW1.MH3 SW2.MH1 SW2.MH2 SW2.MH3 SW3.MH1 SW3.MH2 SW3.MH3 SW4.MH1 SW4.MH2 SW4.MH3 SW5.MH1 SW5.MH2 SW5.MH3 SW6.MH1 SW6.MH2 SW6.MH3 SW7.MH1 SW7.MH2 SW7.MH3 SW8.MH1 SW8.MH2 SW8.MH3 SW9.MH1 SW9.MH2 SW9.MH3 SW10.MH1 SW10.MH2 SW10.MH3 SW11.MH1 SW11.MH2 SW11.MH3 SW12.MH1 SW12.MH2 SW12.MH3 U1.12 U6.2

## Polygon pours and split planes (outlines as drawn)
5V on Top Layer "5V_L01_P000" (solid, pour order 0): 83,0 ccw(c83,2) 85,2 85,80.5 ccw(c83,80.5) 83,82.5 2,82.5 ccw(c2,80.5) 0,80.5 0,2 ccw(c2,2) 2,0
GND on Bottom Layer "GND_L02_P001" (solid, pour order 1): 83,0 ccw(c83,2) 85,2 85,80.5 ccw(c83,80.5) 83,82.5 2,82.5 ccw(c2,80.5) 0,80.5 0,2 ccw(c2,2) 2,0

## Silkscreen, mask and mechanical layers (free items; w line width, h text height)
Top Overlay:
  drawing of 37 lines, arcs and shapes, not listed
Mechanical 1:
  the board outline again, w0.254